# EAGLE board ReedRelaySensor (EAGLE 8.0.1)
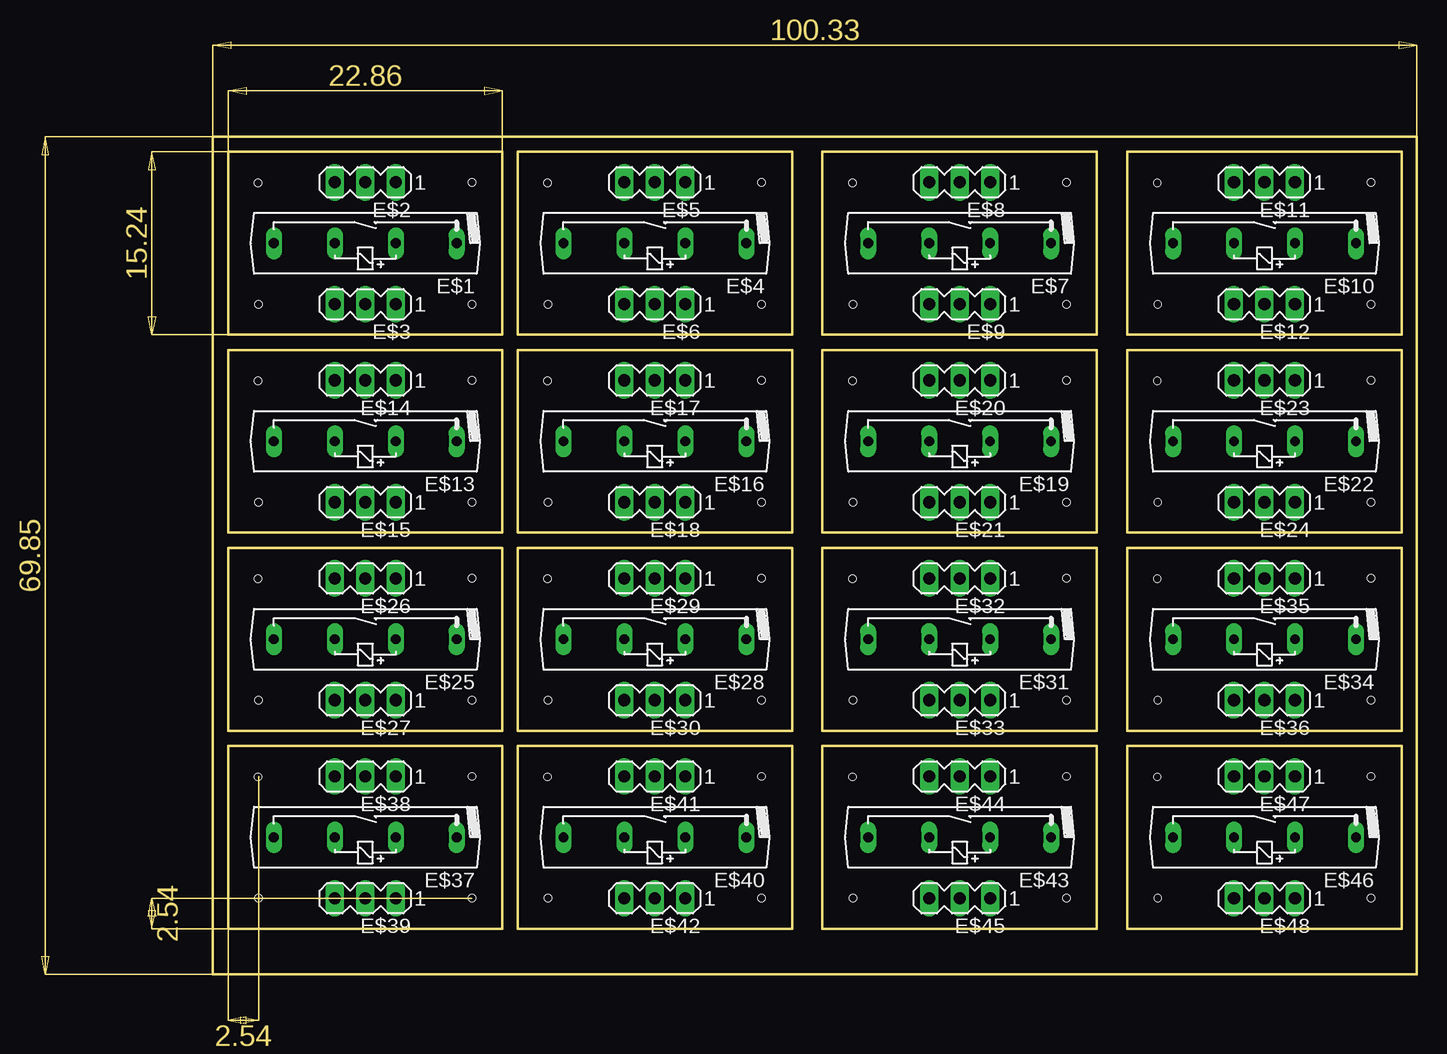
[diagram p0: board, top side]
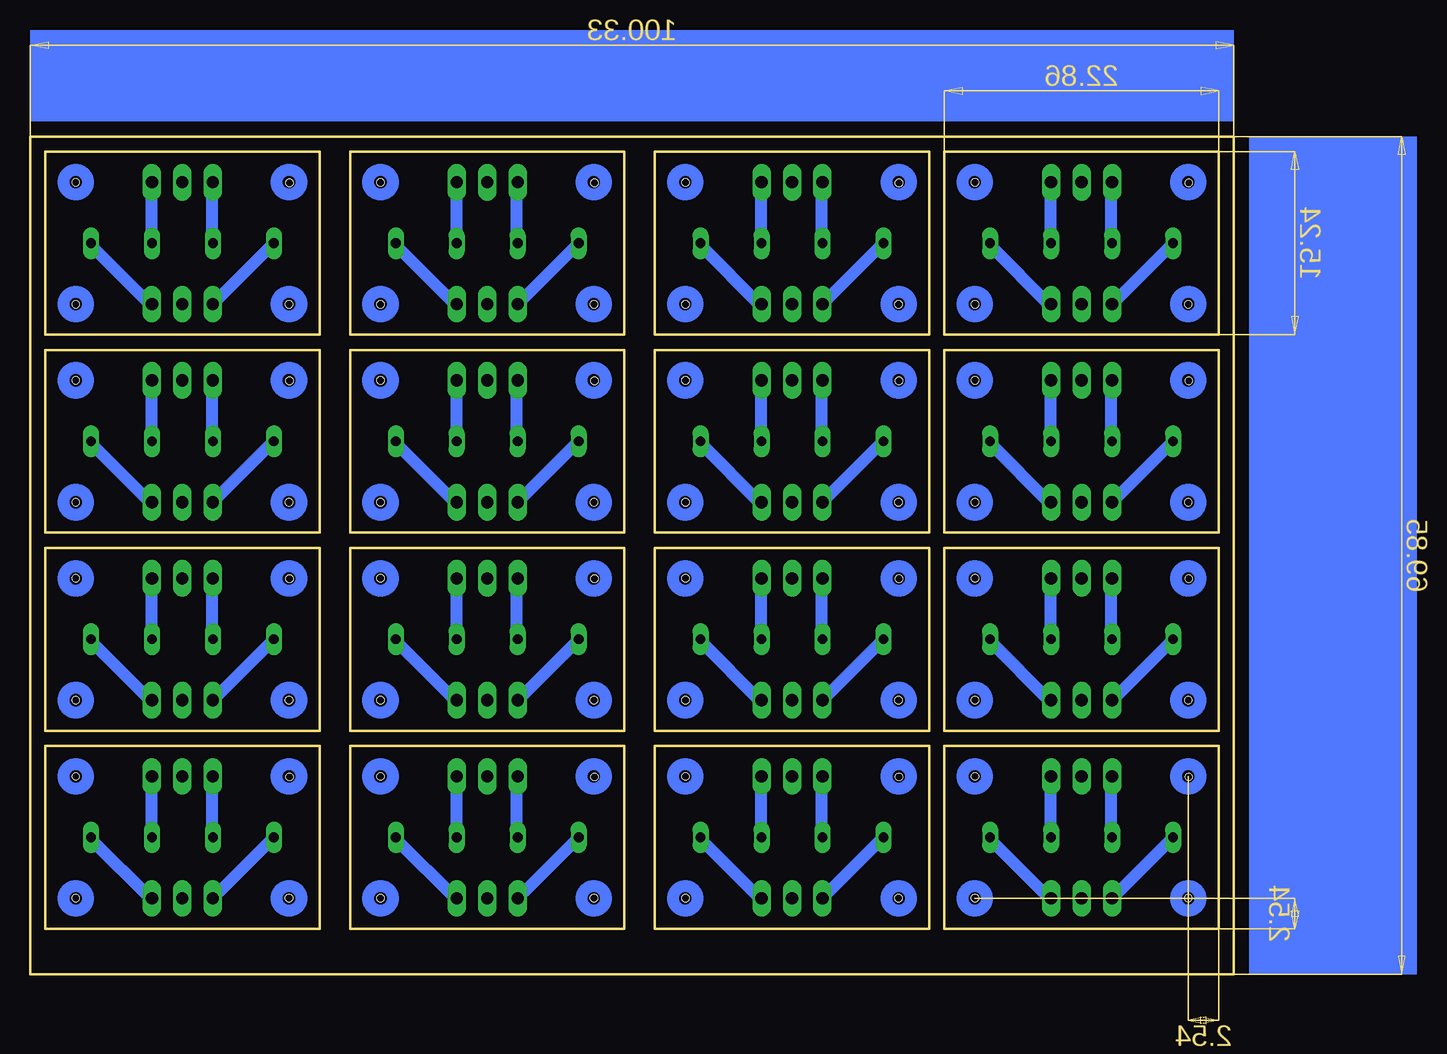
[diagram p1: board, bottom side, seen from below]

Size 100.33 x 69.85 mm. Coordinates in mm from the lower left corner, seen from the top.
Outline: 0,0 0,69.85 100.33,69.85 100.33,0 0,0
Outline: 1.27,68.58 24.13,68.58 24.13,53.34 1.27,53.34 1.27,68.58
Outline: 25.4,68.58 48.26,68.58 48.26,53.34 25.4,53.34 25.4,68.58
Outline: 50.8,68.58 73.66,68.58 73.66,53.34 50.8,53.34 50.8,68.58
Outline: 76.2,68.58 99.06,68.58 99.06,53.34 76.2,53.34 76.2,68.58
Outline: 1.27,52.07 24.13,52.07 24.13,36.83 1.27,36.83 1.27,52.07
Outline: 25.4,52.07 48.26,52.07 48.26,36.83 25.4,36.83 25.4,52.07
Outline: 50.8,52.07 73.66,52.07 73.66,36.83 50.8,36.83 50.8,52.07
Outline: 76.2,52.07 99.06,52.07 99.06,36.83 76.2,36.83 76.2,52.07
Outline: 1.27,35.56 24.13,35.56 24.13,20.32 1.27,20.32 1.27,35.56
Outline: 25.4,35.56 48.26,35.56 48.26,20.32 25.4,20.32 25.4,35.56
Outline: 50.8,35.56 73.66,35.56 73.66,20.32 50.8,20.32 50.8,35.56
Outline: 76.2,35.56 99.06,35.56 99.06,20.32 76.2,20.32 76.2,35.56
Outline: 1.27,19.05 24.13,19.05 24.13,3.81 1.27,3.81 1.27,19.05
Outline: 25.4,19.05 48.26,19.05 48.26,3.81 25.4,3.81 25.4,19.05
Outline: 50.8,19.05 73.66,19.05 73.66,3.81 50.8,3.81 50.8,19.05
Outline: 76.2,19.05 99.06,19.05 99.06,3.81 76.2,3.81 76.2,19.05
Copper layers (1*16): Top 0.035mm / dielectric 1.5mm / Bottom 0.035mm
Design rules "default": minimum track width 10mil, minimum drill 24mil, track to track 8mil, track to pad 8mil, pad to pad 8mil, via to via 8mil, smd to smd 8mil, copper to edge 40mil, drill to drill 8mil, minimum pad ring 10mil, minimum via ring 8mil, stop-mask expansion 4mil, vias tented up to drill 0mil, thermal gap 10mil
Holes 0.6 mm at 3.77,66 3.81,55.88 21.59,66.04 21.59,55.88 27.9,66 27.94,55.88 45.72,66.04 45.72,55.88 53.3,66 53.34,55.88 71.12,66.04 71.12,55.88 78.7,66 78.74,55.88 96.52,66.04 96.52,55.88 3.77,49.49 3.81,39.37 21.59,49.53 21.59,39.37 27.9,49.49 27.94,39.37 45.72,49.53 45.72,39.37 53.3,49.49 53.34,39.37 71.12,49.53 71.12,39.37 78.7,49.49 78.74,39.37 96.52,49.53 96.52,39.37 3.77,32.98 3.81,22.86 21.59,33.02 21.59,22.86 27.9,32.98 27.94,22.86 45.72,33.02 45.72,22.86 53.3,32.98 53.34,22.86 71.12,33.02 71.12,22.86 78.7,32.98 78.74,22.86 96.52,33.02 96.52,22.86 3.77,16.47 3.81,6.35 21.59,16.51 21.59,6.35 27.9,16.47 27.94,6.35 45.72,16.51 45.72,6.35 53.3,16.47 53.34,6.35 71.12,16.51 71.12,6.35 78.7,16.47 78.74,6.35 96.52,16.51 96.52,6.35

## Footprints (pad centres in the part's own frame; a part is rotated, then mirrored left to right if it is on the bottom)
HE3621 = drill 0.813 long: 1 -7.62,0; 2 -2.54,0; 3 2.54,0; 4 7.62,0
MA03-1 = drill 1.016 long: 1 -2.54,0; 2 0,0; 3 2.54,0

## Placement (x,y rotation side)
E$1  [HE3621]  12.7,60.96 180 top
E$2  [MA03-1]  12.7,66.04 180 top
E$3  [MA03-1]  12.7,55.88 180 top
E$4  [HE3621]  36.83,60.96 180 top
E$5  [MA03-1]  36.83,66.04 180 top
E$6  [MA03-1]  36.83,55.88 180 top
E$7  [HE3621]  62.23,60.96 180 top
E$8  [MA03-1]  62.23,66.04 180 top
E$9  [MA03-1]  62.23,55.88 180 top
E$10  [HE3621]  87.63,60.96 180 top
E$11  [MA03-1]  87.63,66.04 180 top
E$12  [MA03-1]  87.63,55.88 180 top
E$13  [HE3621]  12.7,44.45 180 top
E$14  [MA03-1]  12.7,49.53 180 top
E$15  [MA03-1]  12.7,39.37 180 top
E$16  [HE3621]  36.83,44.45 180 top
E$17  [MA03-1]  36.83,49.53 180 top
E$18  [MA03-1]  36.83,39.37 180 top
E$19  [HE3621]  62.23,44.45 180 top
E$20  [MA03-1]  62.23,49.53 180 top
E$21  [MA03-1]  62.23,39.37 180 top
E$22  [HE3621]  87.63,44.45 180 top
E$23  [MA03-1]  87.63,49.53 180 top
E$24  [MA03-1]  87.63,39.37 180 top
E$25  [HE3621]  12.7,27.94 180 top
E$26  [MA03-1]  12.7,33.02 180 top
E$27  [MA03-1]  12.7,22.86 180 top
E$28  [HE3621]  36.83,27.94 180 top
E$29  [MA03-1]  36.83,33.02 180 top
E$30  [MA03-1]  36.83,22.86 180 top
E$31  [HE3621]  62.23,27.94 180 top
E$32  [MA03-1]  62.23,33.02 180 top
E$33  [MA03-1]  62.23,22.86 180 top
E$34  [HE3621]  87.63,27.94 180 top
E$35  [MA03-1]  87.63,33.02 180 top
E$36  [MA03-1]  87.63,22.86 180 top
E$37  [HE3621]  12.7,11.43 180 top
E$38  [MA03-1]  12.7,16.51 180 top
E$39  [MA03-1]  12.7,6.35 180 top
E$40  [HE3621]  36.83,11.43 180 top
E$41  [MA03-1]  36.83,16.51 180 top
E$42  [MA03-1]  36.83,6.35 180 top
E$43  [HE3621]  62.23,11.43 180 top
E$44  [MA03-1]  62.23,16.51 180 top
E$45  [MA03-1]  62.23,6.35 180 top
E$46  [HE3621]  87.63,11.43 180 top
E$47  [MA03-1]  87.63,16.51 180 top
E$48  [MA03-1]  87.63,6.35 180 top

## Library data of the parts
E$1 E$4 E$7 E$10 E$13 E$16 E$19 E$22 E$25 E$28 E$31 E$34 E$37 E$40 E$43 E$46 = relay
E$2 E$3 E$5 E$6 E$8 E$9 E$11 E$12 E$14 E$15 E$17 E$18 E$20 E$21 E$23 E$24 E$26 E$27 E$29 E$30 E$32 E$33 E$35 E$36 E$38 E$39 E$41 E$42 E$44 E$45 E$47 E$48 = con-lstb

## Nets
S$2: E$1.3 E$2.3
S$3: E$1.2 E$2.1
S$4: E$1.1 E$3.1
S$5: E$1.4 E$3.3
S$7: E$4.3 E$5.3
S$8: E$4.2 E$5.1
S$9: E$4.1 E$6.1
S$10: E$4.4 E$6.3
S$11: E$7.3 E$8.3
S$12: E$7.2 E$8.1
S$13: E$7.1 E$9.1
S$14: E$7.4 E$9.3
S$15: E$10.3 E$11.3
S$16: E$10.2 E$11.1
S$17: E$10.1 E$12.1
S$18: E$10.4 E$12.3
S$19: E$13.3 E$14.3
S$20: E$13.2 E$14.1
S$21: E$13.1 E$15.1
S$22: E$13.4 E$15.3
S$23: E$16.3 E$17.3
S$24: E$16.2 E$17.1
S$25: E$16.1 E$18.1
S$26: E$16.4 E$18.3
S$27: E$19.3 E$20.3
S$28: E$19.2 E$20.1
S$29: E$19.1 E$21.1
S$30: E$19.4 E$21.3
S$31: E$22.3 E$23.3
S$32: E$22.2 E$23.1
S$33: E$22.1 E$24.1
S$34: E$22.4 E$24.3
S$35: E$25.3 E$26.3
S$36: E$25.2 E$26.1
S$37: E$25.1 E$27.1
S$38: E$25.4 E$27.3
S$39: E$28.3 E$29.3
S$40: E$28.2 E$29.1
S$41: E$28.1 E$30.1
S$42: E$28.4 E$30.3
S$43: E$31.3 E$32.3
S$44: E$31.2 E$32.1
S$45: E$31.1 E$33.1
S$46: E$31.4 E$33.3
S$47: E$34.3 E$35.3
S$48: E$34.2 E$35.1
S$49: E$34.1 E$36.1
S$50: E$34.4 E$36.3
S$51: E$37.3 E$38.3
S$52: E$37.2 E$38.1
S$53: E$37.1 E$39.1
S$54: E$37.4 E$39.3
S$55: E$40.3 E$41.3
S$56: E$40.2 E$41.1
S$57: E$40.1 E$42.1
S$58: E$40.4 E$42.3
S$59: E$43.3 E$44.3
S$60: E$43.2 E$44.1
S$61: E$43.1 E$45.1
S$62: E$43.4 E$45.3
S$63: E$46.3 E$47.3
S$64: E$46.2 E$47.1
S$65: E$46.1 E$48.1
S$66: E$46.4 E$48.3

## Tracks (layer width: path | path; a pad name or v marks a point on that pad's centre or on a via)
S$2
  Bottom 1.016: E$1.3 10.26,61.04 10.26,65.84 E$2.3
S$3
  Bottom 1.016: E$1.2 15.29,61.04 15.29,65.84 E$2.1
S$4
  Bottom 1.016: E$1.1 20.32,60.81 15.29,55.78 E$3.1
S$5
  Bottom 1.016: E$3.3 E$1.4
S$7
  Bottom 1.016: E$4.3 34.39,61.04 34.39,65.84 E$5.3
S$8
  Bottom 1.016: E$4.2 39.42,61.04 39.42,65.84 E$5.1
S$9
  Bottom 1.016: E$4.1 44.45,60.81 39.42,55.78 E$6.1
S$10
  Bottom 1.016: E$6.3 E$4.4
S$11
  Bottom 1.016: E$7.3 59.79,61.04 59.79,65.84 E$8.3
S$12
  Bottom 1.016: E$7.2 64.82,61.04 64.82,65.84 E$8.1
S$13
  Bottom 1.016: E$7.1 69.85,60.81 64.82,55.78 E$9.1
S$14
  Bottom 1.016: E$9.3 E$7.4
S$15
  Bottom 1.016: E$10.3 85.19,61.04 85.19,65.84 E$11.3
S$16
  Bottom 1.016: E$10.2 90.22,61.04 90.22,65.84 E$11.1
S$17
  Bottom 1.016: E$10.1 95.25,60.81 90.22,55.78 E$12.1
S$18
  Bottom 1.016: E$12.3 E$10.4
S$19
  Bottom 1.016: E$13.3 10.26,44.53 10.26,49.33 E$14.3
S$20
  Bottom 1.016: E$13.2 15.29,44.53 15.29,49.33 E$14.1
S$21
  Bottom 1.016: E$13.1 20.32,44.3 15.29,39.27 E$15.1
S$22
  Bottom 1.016: E$15.3 E$13.4
S$23
  Bottom 1.016: E$16.3 34.39,44.53 34.39,49.33 E$17.3
S$24
  Bottom 1.016: E$16.2 39.42,44.53 39.42,49.33 E$17.1
S$25
  Bottom 1.016: E$16.1 44.45,44.3 39.42,39.27 E$18.1
S$26
  Bottom 1.016: E$18.3 E$16.4
S$27
  Bottom 1.016: E$19.3 59.79,44.53 59.79,49.33 E$20.3
S$28
  Bottom 1.016: E$19.2 64.82,44.53 64.82,49.33 E$20.1
S$29
  Bottom 1.016: E$19.1 69.85,44.3 64.82,39.27 E$21.1
S$30
  Bottom 1.016: E$21.3 E$19.4
S$31
  Bottom 1.016: E$22.3 85.19,44.53 85.19,49.33 E$23.3
S$32
  Bottom 1.016: E$22.2 90.22,44.53 90.22,49.33 E$23.1
S$33
  Bottom 1.016: E$22.1 95.25,44.3 90.22,39.27 E$24.1
S$34
  Bottom 1.016: E$24.3 E$22.4
S$35
  Bottom 1.016: E$25.3 10.26,28.02 10.26,32.82 E$26.3
S$36
  Bottom 1.016: E$25.2 15.29,28.02 15.29,32.82 E$26.1
S$37
  Bottom 1.016: E$25.1 20.32,27.79 15.29,22.76 E$27.1
S$38
  Bottom 1.016: E$27.3 E$25.4
S$39
  Bottom 1.016: E$28.3 34.39,28.02 34.39,32.82 E$29.3
S$40
  Bottom 1.016: E$28.2 39.42,28.02 39.42,32.82 E$29.1
S$41
  Bottom 1.016: E$28.1 44.45,27.79 39.42,22.76 E$30.1
S$42
  Bottom 1.016: E$30.3 E$28.4
S$43
  Bottom 1.016: E$31.3 59.79,28.02 59.79,32.82 E$32.3
S$44
  Bottom 1.016: E$31.2 64.82,28.02 64.82,32.82 E$32.1
S$45
  Bottom 1.016: E$31.1 69.85,27.79 64.82,22.76 E$33.1
S$46
  Bottom 1.016: E$33.3 E$31.4
S$47
  Bottom 1.016: E$34.3 85.19,28.02 85.19,32.82 E$35.3
S$48
  Bottom 1.016: E$34.2 90.22,28.02 90.22,32.82 E$35.1
S$49
  Bottom 1.016: E$34.1 95.25,27.79 90.22,22.76 E$36.1
S$50
  Bottom 1.016: E$36.3 E$34.4
S$51
  Bottom 1.016: E$37.3 10.26,11.51 10.26,16.31 E$38.3
S$52
  Bottom 1.016: E$37.2 15.29,11.51 15.29,16.31 E$38.1
S$53
  Bottom 1.016: E$37.1 20.32,11.28 15.29,6.25 E$39.1
S$54
  Bottom 1.016: E$39.3 E$37.4
S$55
  Bottom 1.016: E$40.3 34.39,11.51 34.39,16.31 E$41.3
S$56
  Bottom 1.016: E$40.2 39.42,11.51 39.42,16.31 E$41.1
S$57
  Bottom 1.016: E$40.1 44.45,11.28 39.42,6.25 E$42.1
S$58
  Bottom 1.016: E$42.3 E$40.4
S$59
  Bottom 1.016: E$43.3 59.79,11.51 59.79,16.31 E$44.3
S$60
  Bottom 1.016: E$43.2 64.82,11.51 64.82,16.31 E$44.1
S$61
  Bottom 1.016: E$43.1 69.85,11.28 64.82,6.25 E$45.1
S$62
  Bottom 1.016: E$45.3 E$43.4
S$63
  Bottom 1.016: E$46.3 85.19,11.51 85.19,16.31 E$47.3
S$64
  Bottom 1.016: E$46.2 90.22,11.51 90.22,16.31 E$47.1
S$65
  Bottom 1.016: E$46.1 95.25,11.28 90.22,6.25 E$48.1
S$66
  Bottom 1.016: E$48.3 E$46.4
(copper drawn outside any net)
  shapes: Bottom area x2, Bottom circle x64